# EAGLE board Projeto de RGB (EAGLE 9.7.0)

Size 197.89 x 120.75 mm. Coordinates in mm from the lower left corner, seen from the top.
Outline: 0,0 197.89,0 197.89,120.75 0,120.75 0,0
Copper layers (1*16): Top 0.035mm / dielectric 1.5mm / Bottom 0.035mm
Design rules "default": minimum track width 6mil, minimum drill 0.35mm, track to track 6mil, track to pad 6mil, pad to pad 6mil, via to via 6mil, smd to smd 6mil, copper to edge 40mil, drill to drill 6mil, minimum pad ring 10mil, minimum via ring 8mil, stop-mask expansion 4mil, vias tented up to drill 0mil, thermal gap 10mil

## Footprints (pad centres in the part's own frame; a part is rotated, then mirrored left to right if it is on the bottom)
LED-RGB-5MM = drill 0.9: B 0.635,0.635; C -0.635,-0.635; G 1.905,-0.635; R -1.905,0.635
RESAD1016W63L850D250B = drill 0.83 pad 1.43: 1 -5.08,0; 2 5.08,0
GL5528 = drill 0.8 pad 1.4: 1 -1.702,0; 2 1.702,0
LCD-I2C = drill 1.016 long: 1 -19.05,-5.08; 2 -19.05,-7.62; 3 -19.05,-10.16; 4 -19.05,-12.7
ARDUINO-UNO-R3-SHIELD = drill 1.016 pad 1.88: 3.3V 24.13,-2.54; 5V 24.13,0; A0 24.13,12.7; A1 24.13,15.24; A2 24.13,17.78; A3 24.13,20.32; A4 24.13,22.86; A5 24.13,25.4; AREF -24.13,-13.97; D2 -24.13,20.32; D3 -24.13,17.78; D4 -24.13,15.24; D5 -24.13,12.7; D6 -24.13,10.16; D7 -24.13,7.62; D8 -24.13,3.81; D9 -24.13,1.27; D10 -24.13,-1.27; D11 -24.13,-3.81; D12 -24.13,-6.35; D13 -24.13,-8.89; GND@0 24.13,2.54; GND@1 24.13,5.08; GND@2 -24.13,-11.43; IOREF 24.13,-7.62; NC 24.13,-10.16; RES 24.13,-5.08; RX -24.13,25.4; SCL -24.13,-19.05; SDA -24.13,-16.51; TX -24.13,22.86; VIN 24.13,7.62

## Placement (x,y rotation side)
D1  LED-RGBRCBG-PTH  [LED-RGB-5MM]  21.89,93.92 0 top
R1  220  [RESAD1016W63L850D250B]  23.16,86.3 90 top
R2  220  [RESAD1016W63L850D250B]  25.7,86.3 90 top
R3  220  [RESAD1016W63L850D250B]  18.08,86.3 90 top
R7  10k  [RESAD1016W63L850D250B]  43.48,71.06 90 top
R8  10k  [RESAD1016W63L850D250B]  84.12,71.06 90 top
R9  10k  [RESAD1016W63L850D250B]  63.8,71.06 90 top
RAZUL  PHOTOCELL_GL5528  [GL5528]  82.85,81.22 0 top
RVERDE  PHOTOCELL_GL5528  [GL5528]  62.53,81.22 0 top
RVERMELHO  PHOTOCELL_GL5528  [GL5528]  42.21,81.22 0 top
U1  LCD-16X2-I2CSUNFOUNDER-IIC  [LCD-I2C]  142.26,113.2 0 top
U2  ARDUINO-UNO-R3-SHIELD  [ARDUINO-UNO-R3-SHIELD]  47.88,29.84 270 top

## Library data of the parts
D1 R1-R3 R7-R9 RAZUL RVERDE RVERMELHO U1 U2 = Tinkercad

## Nets
D1_B: D1.B R1.2
D1_G: D1.G R2.2
D1_R: D1.R R3.2
U2_5V: RAZUL.1 RVERDE.1 RVERMELHO.1 U1.2 U2.5V
U2_A0: R7.2 RVERMELHO.2 U2.A0
U2_A1: R9.2 RVERDE.2 U2.A1
U2_A2: R8.2 RAZUL.2 U2.A2
U2_D9: R2.1 U2.D9
U2_D10: R1.1 U2.D10
U2_D11: R3.1 U2.D11
U2_GND: D1.C R7.1 R8.1 R9.1 U1.1 U2.GND@0 U2.GND@1 U2.GND@2
U2_SCL: U1.4 U2.SCL
U2_SDA: U1.3 U2.SDA

## Tracks (layer width: path | path; a pad name or v marks a point on that pad's centre or on a via)
D1_B  (1 unrouted)
D1_G  (1 unrouted)
D1_R  (1 unrouted)
U2_5V  (4 unrouted)
U2_A0  (2 unrouted)
U2_A1  (2 unrouted)
U2_A2  (2 unrouted)
U2_D9  (1 unrouted)
U2_D10  (1 unrouted)
U2_D11  (1 unrouted)
U2_GND  (7 unrouted)
U2_SCL  (1 unrouted)
U2_SDA  (1 unrouted)